# Altium PCB Remote Linear Actuator.PcbDoc
Units mil, origin at the board's own origin, x right, y up, seen from the top; angles counter-clockwise.
Board outline 6000 x 4000 mil, 2 copper layers (Top Layer, Bottom Layer); 23 components, 21 nets, 129 pads, 0 vias.
Unrouted connection lines stored in the file: 52.
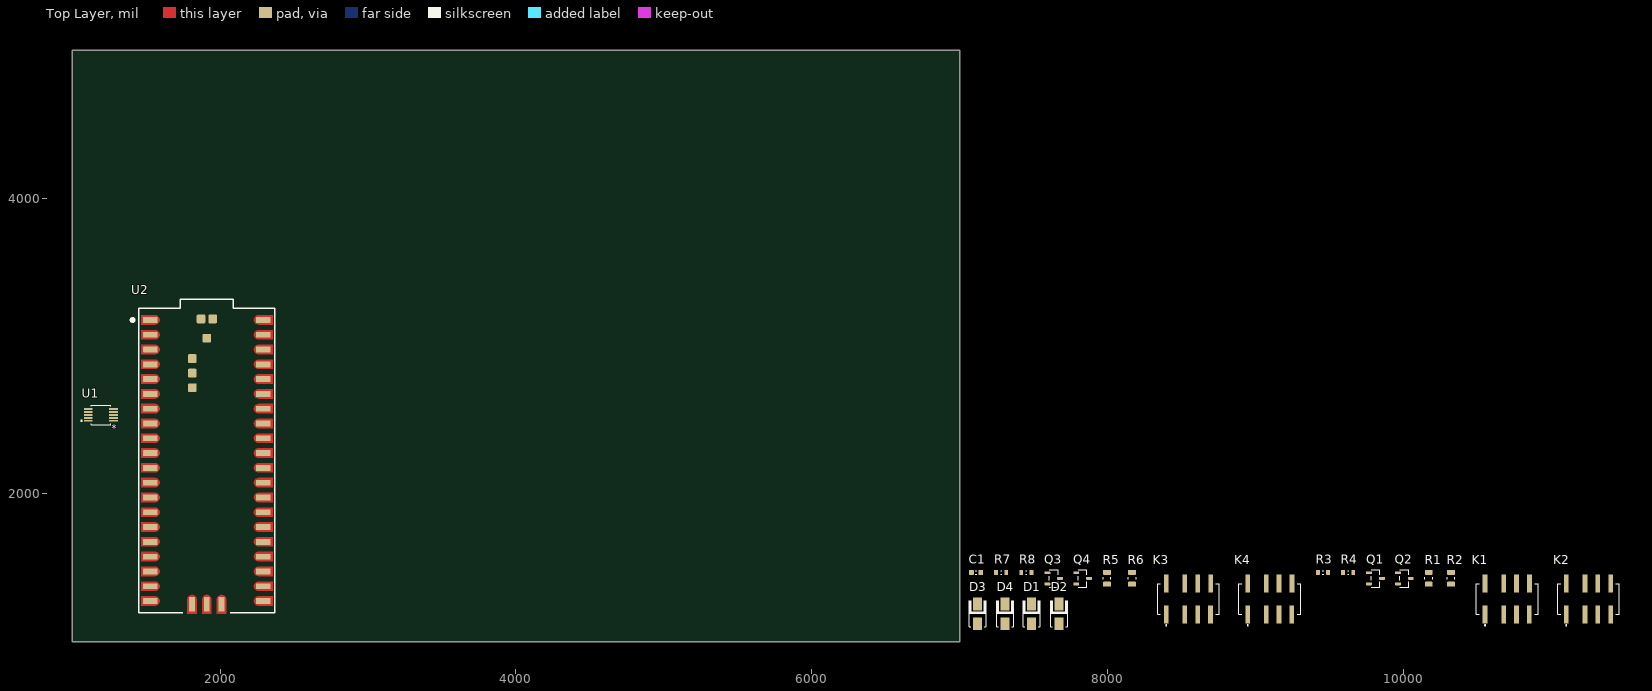
[diagram p0: Top Layer view]
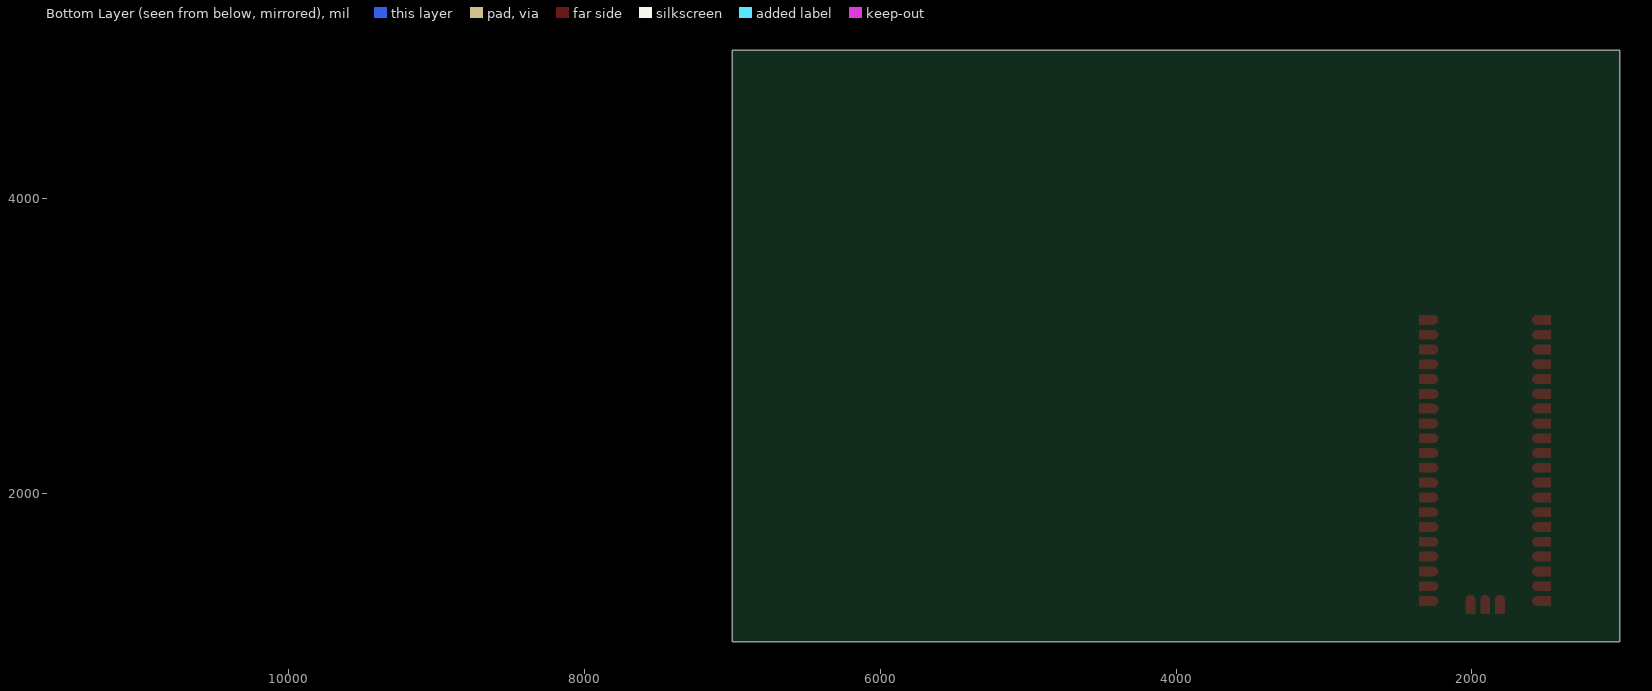
[diagram p1: Bottom Layer view, seen from below]

## Layer stack, top to bottom
Top Solder: solder mask 0.4, Solder Resist, Dk 3.5
Top Layer: signal copper 1.4
Dielectric 1: dielectric 12.6, FR-4, Dk 4.8
Bottom Layer: signal copper 1.4
Bottom Solder: solder mask 0.4, Solder Resist, Dk 3.5

## Board outline
1000,1000 7000,1000 7000,5000 1000,5000

## Design rules (kind name [scope] priority, off if disabled: settings)
Clearance [All] p1: gap=10 ignorepadtopadclearanceinfootprint=FALSE except(0: Arc-Hole Track-Hole SMDPad-Hole THPad-Hole Via-Hole Fill-Hole Poly-Hole Region-Hole Text-Hole)
PolygonConnect [All] p1: connectstyle=Relief reliefconductorwidth=10 reliefentries=4 polygonreliefangle="90 Angle" airgapwidth=10
RoomDefinition "Remote Linear Actuator" [InComponentClass('Remote Linear Actuator')] p1: confinementstyle=ConfineIn formatcopy=TRUE lockcomponents=FALSE outline 990,1020 4345,1020 4345,2770 990,2770
RoutingVias [All] p1: holewidth=28 width=50 viastyle="Through Hole" minholewidth=28 minwidth=50 maxholewidth=28 maxwidth=50
SolderMaskExpansion [All] p1: expansion=4 istentingtop=FALSE
Width [All] p1: maxlimit=10 minlimit=10 preferedwidth=10
30 further rules are at their usual default settings.

## Components (designator, comment, footprint, x,y, rotation, side; value= is the part's Value field where it differs from the comment)
C1 "0.1uF" 0603X90 7110,1470 r0 top
D1 "S1J-13-F" DIOM-430X270X245 7485,1190 r90 top
D2 "S1J-13-F" DIOM-430X270X245 7670,1190 r90 top
D3 "S1J-13-F" DIOM-430X270X245 7120,1190 r90 top
D4 "S1J-13-F" DIOM-430X270X245 7305,1190 r90 top
K1 "UB2-5NU" UB25NU 10700,1290 r0 top
K2 "UB2-5NU" UB25NU 11250,1290 r0 top
K3 "UB2-5NU" UB25NU 8545,1290 r0 top
K4 "UB2-5NU" UB25NU 9095,1290 r0 top
Q1 "ZXM61N03FTA" SOT95P240X110-3-1G-2S-3D 9810,1430 r0 top
Q2 "ZXM61N03FTA" SOT95P240X110-3-1G-2S-3D 10005,1430 r0 top
Q3 "ZXM61N03FTA" SOT95P240X110-3-1G-2S-3D 7635,1430 r0 top
Q4 "ZXM61N03FTA" SOT95P240X110-3-1G-2S-3D 7830,1430 r0 top
R1 "100R" 0805X50 10170,1390 r0 top
R2 "100R" 0805X50 10320,1390 r0 top
R3 "100K" 0603X55 9455,1470 r0 top
R4 "100K" 0603X55 9625,1470 r0 top
R5 "100R" 0805X50 7995,1390 r0 top
R6 "100R" 0805X50 8165,1390 r0 top
R7 "100K" 0603X55 7280,1470 r0 top
R8 "100K" 0603X55 7450,1470 r0 top
U1 "AD5162BRMZ100" RM_10_ADI 1194.5,2534.37 r180 top
U2 "RPI-PICO-MOD" RPI-PICO-MOD 1910,2215 r0 top

## Footprints (in the part's own frame and the unit in brackets; to place one, negate y for a bottom-side part, rotate by r counter-clockwise, add the part's x,y. Pads: shape width x height; smd on the part's side, far side on the other; paste and mask are expansions set on the pad)
0603X55 [mm]
  rrect32% 0.65x0.9 smd: 1(-0.875,0) 2(0.875,0)
  Top Layer pour cut-out: -1.1,0.45 -1.1,-0.45 1.1,-0.45 1.1,0.45
  silkscreen extent -0.1,-0.3 0.1,0.3, body extent -0.85,-0.45 0.85,0.45, height 0.55
0603X90 [mm]
  rrect26% 0.8x0.9 smd: 1(-0.8,0) 2(0.8,0)
  Top Layer pour cut-out: -1.1,0.45 -1.1,-0.45 1.1,-0.45 1.1,0.45
  silkscreen extent -0.1,-0.3 0.1,0.3, body extent -0.85,-0.43 0.85,0.44, height 0.87
0805X50 [mm]
  rrect24% 1.35x0.85 smd: 1(-0.002,0.002) 2(-0.002,2.052)
  Top Layer pour cut-out: -0.677,-0.373 0.673,-0.373 0.673,2.427 -0.677,2.427
  silkscreen extent -0.68,0.83 0.67,1.23, body extent -0.7,-0.07 0.7,2.13, height 0.5
DIOM-430X270X245 [mm]
  rrect13% 2.2x1.6 smd: A(-1.7,0) K(1.7,0)
  silkscreen extent -2.25,-1.4 2.25,1.4, body extent -2.65,-1.45 2.65,1.45, height 2.45
RM_10_ADI [mil]
  rect 60x13 smd paste+0 mask+0: 1(-85.5,39.37) 2(-85.5,19.68) 3(-85.5,0) 4(-85.5,-19.68) 5(-85.5,-39.37) 6(85.5,-39.37) 7(85.5,-19.68) 8(85.5,0) 9(85.5,19.68) 10(85.5,39.37)
  silkscreen extent -66,-66 136,66, body extent -101,-61 101,61, height 43
RPI-PICO-MOD [mm] "RASPBERRY PI PICO RP2040 BOARD"
  rect 2.5x1 smd mask+0.102: 1(-9.69,24.415) 2(-9.69,21.875) 4(-9.69,16.795) 5(-9.69,14.255) 6(-9.69,11.715) 7(-9.69,9.175) 8(-9.69,6.635) 9(-9.69,4.095) 10(-9.69,1.555) 11(-9.69,-0.985) 12(-9.69,-3.525) 13(-9.69,-6.065) 14(-9.69,-8.605) 15(-9.69,-11.145) 16(-9.69,-13.685) 17(-9.69,-16.225) 18(-9.69,-18.765) 19(-9.69,-21.305) 20(-9.69,-23.845)
  rrect25% 2.5x1 smd mask+0.102: 3(-9.69,19.335)
  rect 2.5x1 smd: 21(9.69,-23.845) 22(9.69,-21.305) 23(9.69,-18.765) 24(9.69,-16.225) 25(9.69,-13.685) 26(9.69,-11.145) 27(9.69,-8.605) 28(9.69,-6.065) 29(9.69,-3.525) 30(9.69,-0.985) 31(9.69,1.555) 32(9.69,4.095) 33(9.69,6.635) 34(9.69,9.175) 35(9.69,11.715) 36(9.69,14.255) 37(9.69,16.795) 38(9.69,19.335) 39(9.69,21.875) 40(9.69,24.415)
  rect 1x2.5 smd: 41(-2.54,-24.415) 42(0,-24.415) 43(2.54,-24.415)
  rrect30% 1.5x1.5 smd: 44(0.01,21.292) 45(1.01,24.592) 46(-0.99,24.592) 47(-2.49,17.792) 48(-2.49,15.292) 49(-2.49,12.792)
  Top Layer region: -1.74,-25.999 -3.34,-25.999 -3.34,-23.599 -3.34,-23.599 -3.261,-23.252 -3.039,-22.974 -2.718,-22.819 -2.362,-22.819 -2.041,-22.974 -1.819,-23.252 -1.74,-23.599 -1.74,-23.599
  Top Layer region: 0.8,-25.999 -0.8,-25.999 -0.8,-23.599 -0.8,-23.599 -0.721,-23.252 -0.499,-22.974 -0.178,-22.819 0.178,-22.819 0.499,-22.974 0.721,-23.252 0.8,-23.599 0.8,-23.599
  Top Layer region: 3.34,-25.999 1.74,-25.999 1.74,-23.599 1.74,-23.599 1.819,-23.252 2.041,-22.974 2.362,-22.819 2.718,-22.819 3.039,-22.974 3.261,-23.252 3.34,-23.599 3.34,-23.599
  Top Layer region: -11.292,-24.629 -11.292,-23.029 -8.892,-23.029 -8.892,-23.029 -8.545,-23.108 -8.267,-23.33 -8.112,-23.651 -8.112,-24.007 -8.267,-24.328 -8.545,-24.55 -8.892,-24.629 -8.892,-24.629
  Top Layer region: -11.292,-22.089 -11.292,-20.489 -8.892,-20.489 -8.892,-20.489 -8.545,-20.568 -8.267,-20.79 -8.112,-21.111 -8.112,-21.467 -8.267,-21.788 -8.545,-22.01 -8.892,-22.089 -8.892,-22.089
  Top Layer region: -11.292,-19.549 -11.292,-17.949 -8.892,-17.949 -8.892,-17.949 -8.545,-18.028 -8.267,-18.25 -8.112,-18.571 -8.112,-18.927 -8.267,-19.248 -8.545,-19.47 -8.892,-19.549 -8.892,-19.549
  Top Layer region: -11.292,-17.009 -11.292,-15.409 -8.892,-15.409 -8.892,-15.409 -8.545,-15.488 -8.267,-15.71 -8.112,-16.031 -8.112,-16.387 -8.267,-16.708 -8.545,-16.93 -8.892,-17.009 -8.892,-17.009
  Top Layer region: -11.292,-14.469 -11.292,-12.869 -8.892,-12.869 -8.892,-12.869 -8.545,-12.948 -8.267,-13.17 -8.112,-13.491 -8.112,-13.847 -8.267,-14.168 -8.545,-14.39 -8.892,-14.469 -8.892,-14.469
  Top Layer region: -11.292,-11.929 -11.292,-10.329 -8.892,-10.329 -8.892,-10.329 -8.545,-10.408 -8.267,-10.63 -8.112,-10.951 -8.112,-11.307 -8.267,-11.628 -8.545,-11.85 -8.892,-11.929 -8.892,-11.929
  Top Layer region: -11.292,-9.389 -11.292,-7.789 -8.892,-7.789 -8.892,-7.789 -8.545,-7.868 -8.267,-8.09 -8.112,-8.411 -8.112,-8.767 -8.267,-9.088 -8.545,-9.31 -8.892,-9.389 -8.892,-9.389
  Top Layer region: -11.292,-6.849 -11.292,-5.249 -8.892,-5.249 -8.892,-5.249 -8.545,-5.328 -8.267,-5.55 -8.112,-5.871 -8.112,-6.227 -8.267,-6.548 -8.545,-6.77 -8.892,-6.849 -8.892,-6.849
  Top Layer region: -11.292,-4.309 -11.292,-2.709 -8.892,-2.709 -8.892,-2.709 -8.545,-2.788 -8.267,-3.01 -8.112,-3.331 -8.112,-3.687 -8.267,-4.008 -8.545,-4.23 -8.892,-4.309 -8.892,-4.309
  Top Layer region: -11.292,-1.769 -11.292,-0.169 -8.892,-0.169 -8.892,-0.169 -8.545,-0.248 -8.267,-0.47 -8.112,-0.791 -8.112,-1.147 -8.267,-1.468 -8.545,-1.69 -8.892,-1.769 -8.892,-1.769
  Top Layer region: -11.292,0.771 -11.292,2.371 -8.892,2.371 -8.892,2.371 -8.545,2.292 -8.267,2.07 -8.112,1.749 -8.112,1.393 -8.267,1.072 -8.545,0.85 -8.892,0.771 -8.892,0.771
  Top Layer region: -11.292,3.311 -11.292,4.911 -8.892,4.911 -8.892,4.911 -8.545,4.832 -8.267,4.61 -8.112,4.289 -8.112,3.933 -8.267,3.612 -8.545,3.39 -8.892,3.311 -8.892,3.311
  Top Layer region: -11.292,5.851 -11.292,7.451 -8.892,7.451 -8.892,7.451 -8.545,7.372 -8.267,7.15 -8.112,6.829 -8.112,6.473 -8.267,6.152 -8.545,5.93 -8.892,5.851 -8.892,5.851
  Top Layer region: -11.292,8.391 -11.292,9.991 -8.892,9.991 -8.892,9.991 -8.545,9.912 -8.267,9.69 -8.112,9.369 -8.112,9.013 -8.267,8.692 -8.545,8.47 -8.892,8.391 -8.892,8.391
  Top Layer region: -11.292,10.931 -11.292,12.531 -8.892,12.531 -8.892,12.531 -8.545,12.452 -8.267,12.23 -8.112,11.909 -8.112,11.553 -8.267,11.232 -8.545,11.01 -8.892,10.931 -8.892,10.931
  Top Layer region: -11.292,13.471 -11.292,15.071 -8.892,15.071 -8.892,15.071 -8.545,14.992 -8.267,14.77 -8.112,14.449 -8.112,14.093 -8.267,13.772 -8.545,13.55 -8.892,13.471 -8.892,13.471
  Top Layer region: -11.292,16.011 -11.292,17.611 -8.892,17.611 -8.892,17.611 -8.545,17.532 -8.267,17.31 -8.112,16.989 -8.112,16.633 -8.267,16.312 -8.545,16.09 -8.892,16.011 -8.892,16.011
  Top Layer region: -11.292,18.551 -11.292,20.151 -8.892,20.151 -8.892,20.151 -8.545,20.072 -8.267,19.85 -8.112,19.529 -8.112,19.173 -8.267,18.852 -8.545,18.63 -8.892,18.551 -8.892,18.551
  Top Layer region: -11.292,21.091 -11.292,22.691 -8.892,22.691 -8.892,22.691 -8.545,22.612 -8.267,22.39 -8.112,22.069 -8.112,21.713 -8.267,21.392 -8.545,21.17 -8.892,21.091 -8.892,21.091
  Top Layer region: -11.292,23.631 -11.292,25.231 -8.892,25.231 -8.892,25.231 -8.545,25.152 -8.267,24.93 -8.112,24.609 -8.112,24.253 -8.267,23.932 -8.545,23.71 -8.892,23.631 -8.892,23.631
  Top Layer region: 11.292,23.631 11.292,25.231 8.892,25.231 8.892,25.231 8.545,25.152 8.267,24.93 8.112,24.609 8.112,24.253 8.267,23.932 8.545,23.71 8.892,23.631 8.892,23.631
  Top Layer region: 11.292,21.091 11.292,22.691 8.892,22.691 8.892,22.691 8.545,22.612 8.267,22.39 8.112,22.069 8.112,21.713 8.267,21.392 8.545,21.17 8.892,21.091 8.892,21.091
  Top Layer region: 11.292,18.551 11.292,20.151 8.892,20.151 8.892,20.151 8.545,20.072 8.267,19.85 8.112,19.529 8.112,19.173 8.267,18.852 8.545,18.63 8.892,18.551 8.892,18.551
  Top Layer region: 11.292,16.011 11.292,17.611 8.892,17.611 8.892,17.611 8.545,17.532 8.267,17.31 8.112,16.989 8.112,16.633 8.267,16.312 8.545,16.09 8.892,16.011 8.892,16.011
  Top Layer region: 11.292,13.471 11.292,15.071 8.892,15.071 8.892,15.071 8.545,14.992 8.267,14.77 8.112,14.449 8.112,14.093 8.267,13.772 8.545,13.55 8.892,13.471 8.892,13.471
  Top Layer region: 11.292,10.931 11.292,12.531 8.892,12.531 8.892,12.531 8.545,12.452 8.267,12.23 8.112,11.909 8.112,11.553 8.267,11.232 8.545,11.01 8.892,10.931 8.892,10.931
  Top Layer region: 11.292,8.391 11.292,9.991 8.892,9.991 8.892,9.991 8.545,9.912 8.267,9.69 8.112,9.369 8.112,9.013 8.267,8.692 8.545,8.47 8.892,8.391 8.892,8.391
  Top Layer region: 11.292,5.851 11.292,7.451 8.892,7.451 8.892,7.451 8.545,7.372 8.267,7.15 8.112,6.829 8.112,6.473 8.267,6.152 8.545,5.93 8.892,5.851 8.892,5.851
  Top Layer region: 11.292,3.311 11.292,4.911 8.892,4.911 8.892,4.911 8.545,4.832 8.267,4.61 8.112,4.289 8.112,3.933 8.267,3.612 8.545,3.39 8.892,3.311 8.892,3.311
  Top Layer region: 11.292,0.771 11.292,2.371 8.892,2.371 8.892,2.371 8.545,2.292 8.267,2.07 8.112,1.749 8.112,1.393 8.267,1.072 8.545,0.85 8.892,0.771 8.892,0.771
  Top Layer region: 11.292,-1.769 11.292,-0.169 8.892,-0.169 8.892,-0.169 8.545,-0.248 8.267,-0.47 8.112,-0.791 8.112,-1.147 8.267,-1.468 8.545,-1.69 8.892,-1.769 8.892,-1.769
  Top Layer region: 11.292,-4.309 11.292,-2.709 8.892,-2.709 8.892,-2.709 8.545,-2.788 8.267,-3.01 8.112,-3.331 8.112,-3.687 8.267,-4.008 8.545,-4.23 8.892,-4.309 8.892,-4.309
  Top Layer region: 11.292,-6.849 11.292,-5.249 8.892,-5.249 8.892,-5.249 8.545,-5.328 8.267,-5.55 8.112,-5.871 8.112,-6.227 8.267,-6.548 8.545,-6.77 8.892,-6.849 8.892,-6.849
  Top Layer region: 11.292,-9.389 11.292,-7.789 8.892,-7.789 8.892,-7.789 8.545,-7.868 8.267,-8.09 8.112,-8.411 8.112,-8.767 8.267,-9.088 8.545,-9.31 8.892,-9.389 8.892,-9.389
  Top Layer region: 11.292,-11.929 11.292,-10.329 8.892,-10.329 8.892,-10.329 8.545,-10.408 8.267,-10.63 8.112,-10.951 8.112,-11.307 8.267,-11.628 8.545,-11.85 8.892,-11.929 8.892,-11.929
  Top Layer region: 11.292,-14.469 11.292,-12.869 8.892,-12.869 8.892,-12.869 8.545,-12.948 8.267,-13.17 8.112,-13.491 8.112,-13.847 8.267,-14.168 8.545,-14.39 8.892,-14.469 8.892,-14.469
  Top Layer region: 11.292,-17.009 11.292,-15.409 8.892,-15.409 8.892,-15.409 8.545,-15.488 8.267,-15.71 8.112,-16.031 8.112,-16.387 8.267,-16.708 8.545,-16.93 8.892,-17.009 8.892,-17.009
  Top Layer region: 11.292,-19.549 11.292,-17.949 8.892,-17.949 8.892,-17.949 8.545,-18.028 8.267,-18.25 8.112,-18.571 8.112,-18.927 8.267,-19.248 8.545,-19.47 8.892,-19.549 8.892,-19.549
  Top Layer region: 11.292,-22.089 11.292,-20.489 8.892,-20.489 8.892,-20.489 8.545,-20.568 8.267,-20.79 8.112,-21.111 8.112,-21.467 8.267,-21.788 8.545,-22.01 8.892,-22.089 8.892,-22.089
  Top Layer region: 11.292,-24.629 11.292,-23.029 8.892,-23.029 8.892,-23.029 8.545,-23.108 8.267,-23.33 8.112,-23.651 8.112,-24.007 8.267,-24.328 8.545,-24.55 8.892,-24.629 8.892,-24.629
  silkscreen extent -12.99,-25.88 11.68,27.94, body extent -10.49,-25.21 10.51,27.22, height 3.69
SOT95P240X110-3-1G-2S-3D [mm]
  rrect46% 1x0.5 smd: D(1.1,0) G(-1.1,0.95) S(-1.1,-0.95)
  silkscreen extent -0.75,-1.5 0.75,1.5, body extent -1.25,-1.5 1.25,1.5, height 1.1
UB25NU [mm]
  rect 0.8x3.1 smd: 1(-3.8,-2.65) 2(-0.6,-2.65) 3(1.6,-2.65) 4(3.8,-2.65) 5(3.82,2.65) 6(1.6,2.65) 7(-0.6,2.65) 8(-3.8,2.65)
  silkscreen extent -5.3,-4.6 5.3,2.65, body extent -5.3,-4.12 5.3,4.12, height 8.9

## Part data
C1: library part CAP, "0.1uf, 50V,0603", Manufacturer=Yageo, ManufacturerPart=CC0603KRX7R9BB104, AllowSubstitute=Yes, Supplier=Digi-Key, SupplierPart=311-1344-6-ND
D1 D2 D3 D4: library part Diode, "DIODE GEN PURP 600V 1A SMA", Manufacturer="Diodes Incorporated", AllowSubstitute=No, ManufacturerPart=S1J-13-F, PartDescription="DIODE GEN PURP 600V 1A SMA", Supplier=Digi-Key, SupplierPart=S1J-FDICT-ND
K1 K2 K3 K4: "Relay or Contactor", Manufacturer_Name=Kemet, Datasheet Link=https://datasheet.datasheetarchive.com/originals/distributors/DKDS-28/541666.pdf, Height=8.8mm, Manufacturer_Part_Number=UB2-5NU
Q1 Q2 Q3 Q4: library part MOSFET-N, "30V N-CHANNEL ENHANCEMENT MODE MOSFET", Manufacturer=Zetex, AllowSubstitute=No, ManufacturerPart=ZXM61N03FTA, PartDescription="30V N-CHANNEL ENHANCEMENT MODE MOSFET", Supplier=Digi-Key, SupplierPart=ZXM61N03FCT-ND
R1 R2 R5 R6: library part RES, "100R 0805", Manufacturer=Yageo, ManufacturerPart=RC0805FR-07150RL, AllowSubstitute=Yes, Supplier=Digi-Key, SupplierPart=311-150CRCT-ND
R3 R4 R7 R8: library part RES, "RES SMD 100K OHM 1% 1/10W 0603", Manufacturer=Yageo, ManufacturerPart=RC0603FR-07100KL, AllowSubstitute=Yes, ClassName=UnderCan, PartDescription="RES SMD 100K OHM 1% 1/10W 0603", Supplier=Digi-Key, SupplierPart=311-100KHRCT-ND
U1: "No Description Available", Mfr_Name="Analog Devices Inc", Copyright="Copyright (C) 2022 Ultra Librarian. All rights reserved.", Digi-Key_Part_Number_1=AD5162BRMZ100-ND, Digi-Key_Part_Number_2=2156-AD5162BRMZ100-ND, Manufacturer_Part_Number=AD5162BRMZ100, RefDes=RefDes, Type=DEV
U2: "RASPBERRY PI PICO RP2040 BOARD", Manufacturer="Raspberry Pi Foundation", Manufacturer Part No=SC0915, Supplier Part No=2648-SC0915CT-ND, Mounting Technology=SMT, Supplier=DigiKey, Supplier Link=https://www.digikey.com/en/products/detail/raspberry-pi/SC0915/13684020

## Nets (pads, with @x,y where several pads share a name; then routed paths per layer and width w, separated by ;. In a path a pad name is that pad's centre, name@x,y a point inside that pad or via, vN(x,y) a via of type N, cw(c..) or ccw(c..) an arc to the next point about the centre after c; other vN are vias at no path point)
+5: D1.K D2.K D3.K D4.K K1.1 K2.1 K3.1 K4.1 U2.40
A1: K1.4 U1.2
B1: K3.4 U1.1
CS: U1.8 U2.7
GND: Q1.S Q2.S Q3.S Q4.S R3.2 R4.2 R7.2 R8.2 U1.4 U2.3 U2.8 U2.13 U2.18 U2.23 U2.28 U2.33 U2.38 U2.42
GP0: R1.2 U2.1
GP1: R5.2 U2.2
GP2: R2.2 U2.4
GP3: R6.2 U2.5
MOSI: U1.7 U2.10
NetD1_A: D1.A K1.8 Q1.D
NetD2_A: D2.A K2.8 Q2.D
NetD3_A: D3.A K3.8 Q3.D
NetD4_A: D4.A K4.8 Q4.D
NetQ1_G: Q1.G R1.1 R3.1
NetQ2_G: Q2.G R2.1 R4.1
NetQ3_G: Q3.G R5.1 R7.1
NetQ4_G: Q4.G R6.1 R8.1
SCK: U1.6 U2.9
VCC: U1.5 U2.36
W1: K1.5 U1.10
pads on no net: C1.1 C1.2 K1.2 K1.3 K1.6 K1.7 K2.2 K2.3 K2.4 K2.5 K2.6 K2.7 K3.2 K3.3 K3.5 K3.6 K3.7 K4.2 K4.3 K4.4 K4.5 K4.6 K4.7 U1.3 U1.9 U2.6 U2.11 U2.12 U2.14 U2.15 U2.16 U2.17 U2.19 U2.20 U2.21 U2.22 U2.24 U2.25 U2.26 U2.27 U2.29 U2.30 U2.31 U2.32 U2.34 U2.35 U2.37 U2.39 U2.41 U2.43 U2.44 U2.45 U2.46 U2.47 U2.48 U2.49

## Text inside footprints (layer, text, board x,y; h text height)
U1: Top Overlay "*" at 1302.5,2487 h50 r180; Mechanical 13 "*" at 1253,2526.37 h50 r180